# Altium PCB rascal-1.2.pcbdoc (part 3 of 3)
Units mm, origin at the board's own origin, x right, y up, seen from the top; angles counter-clockwise.
Board outline 114.3 x 53.34 mm, 4 copper layers (Top Layer, Ground Plane, Power Plane, Bottom Layer); 125 components, 215 nets, 799 pads, 468 vias.
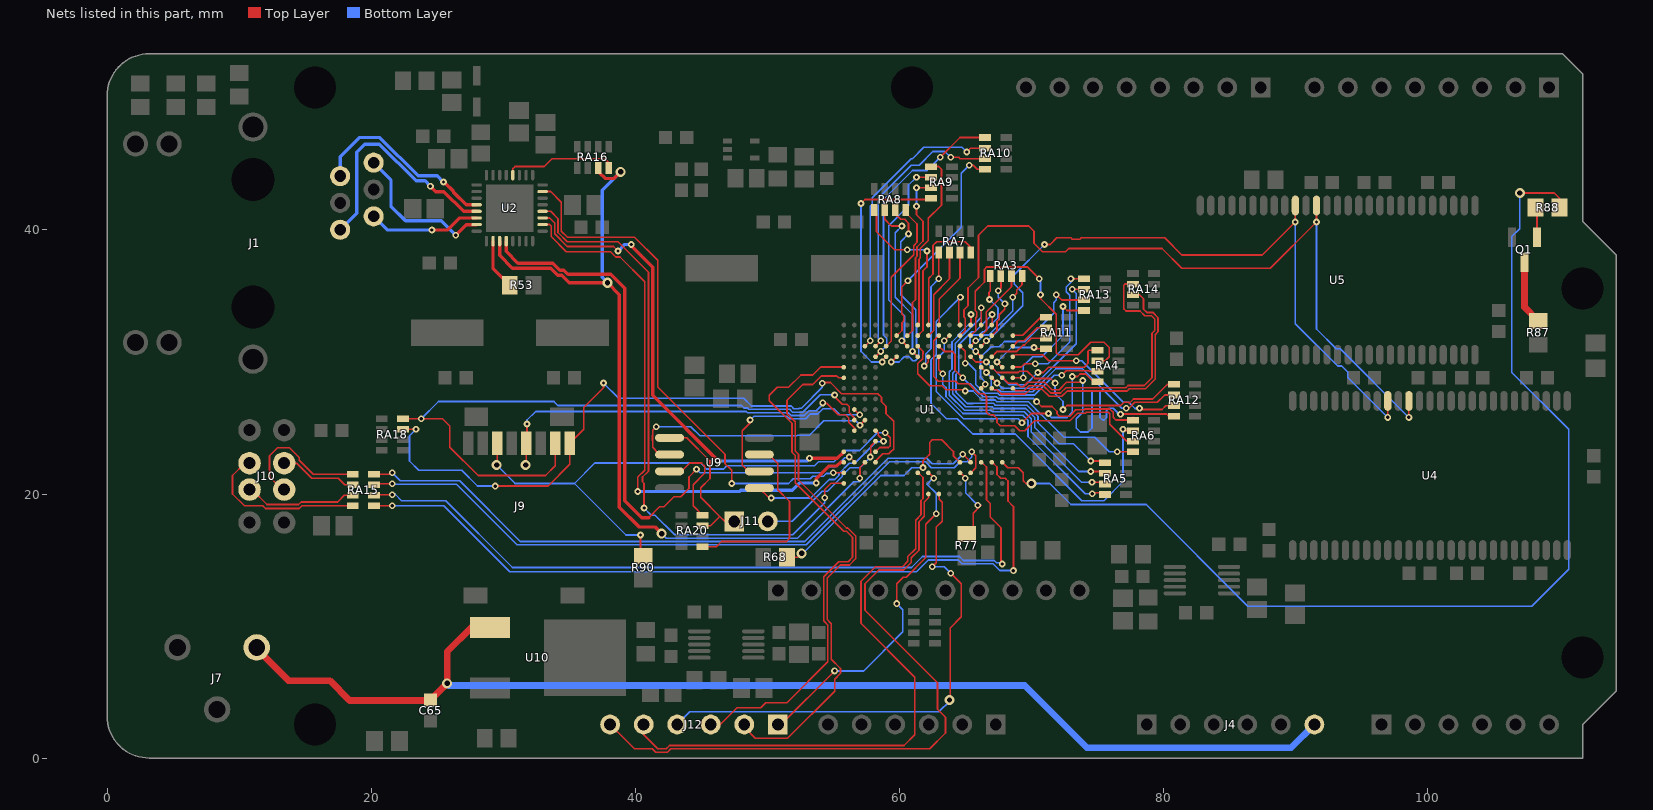
[diagram p5: the nets of this part, all layers, seen from the top]

## Via types
v1: diameter 0.508, hole 0.254, Top Layer to Bottom Layer, 360 vias
v2: diameter 0.762, hole 0.406, Top Layer to Bottom Layer, 93 vias
v3: diameter 0.66, hole 0.33, Top Layer to Bottom Layer, tented top, 9 vias
v4: diameter 3, hole 2.3, Top Layer to Bottom Layer, 4 vias
v5: diameter 1.524, hole 0.889, Top Layer to Bottom Layer, 2 vias

## Nets (pads, with @x,y where several pads share a name; then routed paths per layer and width w, separated by ;. In a path a pad name is that pad's centre, name@x,y a point inside that pad or via, vN(x,y) a via of type N, cw(c..) or ccw(c..) an arc to the next point about the centre after c; other vN are vias at no path point) (continued)
NetJ9_3: J9.3 R90.2 U1.P13 | length 44.5
  Top Layer w0.127: v2@29.5,22.3 29.55,22.35 J9.3@29.55,23.85 ; v1(40.4,16.9) 40.4,15.4 R90.2@40.6,15.2 ; U1.P13@58.23,23.216 58.53,23.516 59.182,23.516 59.316,23.65 59.316,24.265 v1(58.94,24.64)
  Bottom Layer w0.127: v2(29.5,22.2) 30.9,20.8 35.4,20.8 ; v1@40.5,16.9 v1(40.4,16.9) 39.3,16.9 35.4,20.8 ; v1(58.94,24.64) 58.34,24.64 57,23.3 55.914,23.3 55.058,22.444 53.883,22.444 53.573,22.134 46.942,22.134 46.708,21.9 45.4,21.9 44.956,22.344 36.944,22.344 35.4,20.8
NetJ9_5: J9.5 U1.T11 | length 30.2
  Top Layer w0.127: v2(31.7,22.2) 31.75,22.25 J9.5@31.75,23.85 31.8,23.9 v1@31.8,25.2 ; v1@54.164,26.864 54.494,26.864 55.366,25.993 55.928,25.993 56.168,25.753 56.168,25.447 56.16,25.44 56.63,24.97 U1.T11@56.63,24.816
  Bottom Layer w0.127: v1@31.8,25.2 v1(31.8,25.3) 31.8,25.6 32.454,26.254 48.405,26.254 48.505,26.154 51.599,26.154 51.805,25.947 52.801,25.947 53.015,26.161 53.164,26.31 53.722,26.31 v1@54.2,26.788
  other v1: 54.2,26.9
NetJ9_7: J9.7 RA18.8 U1.T10 | length 51.6
  Top Layer w0.127: RA18.8@22.4,25.7 25.4,25.7 25.956,25.144 25.956,23.544 28.1,21.4 33.2,21.4 33.95,22.15 J9.7@33.95,23.85 ; v1@54.991,27.453 55.072,27.453 55.072,27.407 55.679,26.8 56.025,26.8 56.2,26.625 56.2,26.171 56.63,25.741 U1.T10@56.63,25.616
  Bottom Layer w0.127: v1(23.8,25.7) 25.1,27 33.841,27 34.141,26.7 48.053,26.7 48.245,26.508 48.51,26.508 48.61,26.408 51.704,26.408 51.911,26.201 52.696,26.201 52.91,26.415 54.011,27.517 v1@54.927,27.517
  other v1: 55.1,27.5
NetJ9_8: J9.8 RA18.7 U1.P14 | length 53.9
  Top Layer w0.127: RA18.7@22.4,24.9 v1(23.4,24.9) ; v1(29.4,20.6) 33.4,20.6 35.05,22.25 J9.8@35.05,23.85 36.1,24.9 36.1,26.554 37.6,28.054 v1@37.6,28.4 ; v1(54.173,28.398) 54.22,28.444 54.784,28.444 55.628,27.6 58.38,27.6 58.658,27.322 58.658,26.976 58.801,26.833 ; U1.P14@58.23,22.416 58.23,22.51 58.758,23.038 59.199,23.038 59.437,23.276 59.451,23.276 59.57,23.395 59.57,25.508 58.991,26.086 58.991,26.636 58.801,26.826
  Bottom Layer w0.127: v1(23.4,24.9) 22.9,24.4 22.9,22.5 23.6,21.8 26.859,21.8 28.059,20.6 v1(29.4,20.6) ; v1@37.6,28.4 38.746,27.254 48.217,27.254 48.809,26.662 51.809,26.662 52.016,26.455 52.384,26.455 52.418,26.489 52.589,26.489 54.173,28.073 v1(54.173,28.398)
  other v1: 37.6,28.413
NetJ10_2: J10.2 RA15.2 | length 5.8
  Top Layer w0.127: J10.2@13.51,22.336 14.364,22.336 15.5,21.2 17.5,21.2 18,20.7 RA15.2@18.6,20.7
NetJ10_3: J10.3 RA15.1 | length 10.6
  Top Layer w0.127: J10.3@13.46,20.386 13.41,20.386 13.214,20.386 12.3,21.3 12.3,22.9 12.9,23.5 13.817,23.5 14.55,22.767 14.55,22.55 15.6,21.5 RA15.1@18.6,21.5
NetJ10_6: J10.6 RA15.4 | length 12.8
  Top Layer w0.127: J10.6@10.89,22.336 10.84,22.286 10.79,22.286 10.386,22.286 9.5,21.4 9.5,20 10.4,19.1 11.8,19.1 12,18.9 14.559,18.9 14.759,19.1 RA15.4@18.6,19.1
NetJ10_7: J10.7 RA15.3 | length 8.3
  Top Layer w0.127: J10.7@11.07,20.244 12.114,19.2 14.5,19.2 14.7,19.4 17.473,19.4 17.973,19.9 RA15.3@18.6,19.9
NetJ11_1: J11.1 RA20.7 U9.1 | length 11.2
  Top Layer w0.127: U9.1@43.147,24.257 43.901,24.257 45.658,22.5 45.658,21.169 44.958,20.469 44.958,19.742 46.4,18.3 ; RA20.7@45.1,17.6 45.7,17.6 46.4,18.3 ; J11.1@47.498,17.928 46.772,17.928 46.4,18.3
NetJ11_2: J11.2 U1.P12 | length 11.3
  Top Layer w0.127: v1(57.81,22.8) 57.818,22.8 v1@57.836,22.818 ; v1@57.836,22.805 v1@57.836,22.818 ; U1.P12@58.23,24.016 57.832,23.618 57.832,23.047 57.836,23.043 v1@57.836,22.818
  Bottom Layer w0.127: J11.2@50.038,17.928 51.893,17.928 54.165,20.2 54.563,20.2 55.689,21.327 55.689,21.421 56.261,21.992 57.023,21.992 v1@57.836,22.805
NetJ12_1: J12.1 U1.J15 | length 26.7
  Top Layer w0.127: J12.1@50.77,2.57 50.8,2.57 51.07,2.57 v1(55.1,6.6) ; v1(59.8,11.7) 59.8,13.2 60.3,13.7 60.515,13.7 62,15.185 62,17.7 v1(62.8,18.5) ; U1.J15@62.23,21.616 v1@62.6,21.246
  Bottom Layer w0.127: v1(55.1,6.6) 57.3,6.6 60.269,9.569 60.269,11.231 v1(59.8,11.7) ; v1@62.6,21.246 62.577,21.223 62.1,20.746 62.8,20.046 v1(62.8,18.5)
  other v1: 62.6,21.2
NetJ12_2: J12.2 U1.U6 | length 40.2
  Top Layer w0.127: J12.2@48.31,2.59 48.31,2.29 49.1,1.5 51.529,1.5 55.1,5.071 55.1,5.971 55.544,6.416 55.544,6.784 54.845,7.484 54.845,10.184 54.535,10.494 54.535,13.635 55.525,14.625 56.23,14.625 56.713,15.109 56.713,16.818 56.105,17.426 56.007,17.426 52.37,21.063 52.37,23.022 52.128,23.263 52.128,25.46 51.5,26.089 51.5,27.1 52.696,28.296 53.443,28.296 54.091,28.944 55.275,28.944 55.404,28.816 U1.U6@55.83,28.816
NetJ12_3: J12.3 U1.U5 | length 41.8
  Top Layer w0.127: J12.3@45.7,2.5 46.4,2.5 47.71,3.81 49.5,3.81 49.89,4.2 51.5,4.2 54.591,7.291 54.591,10.079 54.281,10.389 54.281,13.74 55.42,14.879 56.125,14.879 56.459,15.214 56.459,16.713 56,17.172 55.788,17.172 52.116,20.844 52.116,22.917 51.874,23.158 51.874,25.355 50.156,27.074 50.156,27.484 50.745,28.074 51.615,28.074 52.56,29.019 53.448,29.019 54.045,29.616 U1.U5@55.83,29.616
NetJ12_4: J12.4 U1.H17 | length 39.2
  Top Layer w0.127: v1(62.5,14.5) 62.8,14.8 62.8,17.5 63.246,17.946 63.246,19.384 63.03,19.6 63.03,20 U1.H17@63.03,20.016 ; v2@63.85,4.4 63.85,9.85 64.7,10.7 64.7,13.2 v1(63.9,14)
  Bottom Layer w0.127: J12.4@43.18,2.54 44.14,3.5 63,3.5 v2@63.85,4.35 ; v1(62.5,14.5) 63.4,14.5 v1(63.9,14)
  other v2: 63.8,4.4
NetJ12_5: J12.5 U1.K15 | length 47
  Top Layer w0.127: J12.5@40.64,2.54 40.64,1.774 41.716,0.699 42.339,0.699 42.595,0.954 60.354,0.954 61.17,1.77 61.17,6.13 57.1,10.2 57.1,13.4 58.201,14.502 60.239,14.502 60.649,14.911 60.649,15.267 61.238,15.856 61.238,18.016 61.646,18.424 61.646,19.505 61.8,19.659 61.8,21.246 U1.K15@61.43,21.616
NetJ12_6: J12.6 U1.J17 | length 50.6
  Top Layer w0.127: J12.6@38.1,2.54 39.94,0.7 41.3,0.7 41.555,0.445 42.445,0.445 42.7,0.7 62.3,0.7 63.5,1.9 63.5,3.1 62.9,3.7 62.9,5.7 57.4,11.2 57.4,13.2 58.448,14.248 60.345,14.248 60.903,14.805 60.903,15.162 61.492,15.751 61.492,17.91 61.9,18.318 61.9,19.4 62.23,19.73 U1.J17@62.23,20.016
NetQ1_2: Q1.1 R88.2 | length 2.3
  Top Layer w0.127: R88.2@108.2,41.7 108.3,41.6 Q1.1@108.3,39.45
NetQ1_3: Q1.3 R87.2 | length 4.9
  Top Layer w0.508: Q1.3@107.35,37.55 107.35,34.15 R87.2@108.4,33.1
NetR53_1: R53.1 U2.10 | length 3.9
  Top Layer w0.254: U2.10@29.23,39.156 29.23,37.07 R53.1@30.5,35.8
NetR68_2: R68.2 U1.F14 | length 18.5
  Top Layer w0.127: R68.2@51.5,15.2 52.3,15.2 v2(52.6,15.5) ; v1(61.8,22) 61.8,22.521 62.047,22.768 62.06,22.768 62.3,23.008 62.3,23.9 62.5,24.1 63.224,24.1 64.1,23.224 64.1,22.9 U1.F14@64.6,22.4
  Bottom Layer w0.127: v2@52.67,15.444 52.67,15.47 58.6,21.4 60.353,21.4 60.953,22 v1(61.8,22)
NetR77_2: R77.2 U1.F15 | length 6.7
  Top Layer w0.127: R77.2@64.5,16.9 65.1,16.9 65.393,16.9 65.6,17.107 65.6,18.553 66.074,19.026 v1@66.196,19.148 ; U1.F15@64.63,21.616 65.023,21.223 v1@65.03,21.216
  Bottom Layer w0.127: v1@65.03,21.216 65.03,21.2 65.03,20.07 v1(65.952,19.148) v1@66.196,19.148
  other v1: 65,21.2
NetR88_1: R88.1 U1.B14 | length 82.9
  Top Layer w0.127: U1.B14@67.8,22.4 68.21,21.99 69.01,21.99 69.4,21.6 69.4,21 69.6,20.8 ; v2(107,42.8) 109.6,42.8 110,42.4 R88.1@110,41.7
  Bottom Layer w0.127: v2(70,20.8) 71.4,20.8 73,19.2 78.7,19.2 86.4,11.5 107.908,11.5 110.7,14.292 110.7,24.9 106.4,29.2 106.4,39.5 107,40.1 v2(107,42.8)
NetRA3_1: RA3.1 U1.D4 | length 8
  Top Layer w0.127: v1(65.8,30.8) U1.D4@66.2,30.4 ; v1@66.8,34.735 66.8,35.274 66.9,35.374 RA3.1@66.9,36.5
  Bottom Layer w0.127: v1(65.8,30.8) 65.7,30.8 65.35,31.15 65.35,31.779 65.616,32.045 66.057,32.045 66.311,32.299 66.424,32.299 67.474,33.349 67.474,34.096 v1(66.835,34.735)
NetRA3_2: RA3.2 U1.C2 | length 5.2
  Top Layer w0.127: U1.C2@67.03,32.016 67.4,32.386 67.4,33.064 67.57,33.234 67.57,33.57 68,34 v1(68,34.4) ; v1(67.5,35.4) 67.7,35.6 RA3.2@67.7,36.5
  Bottom Layer w0.127: v1(67.5,35.4) 67.5,34.9 v1(68,34.4)
NetRA3_3: RA3.3 U1.D2 | length 5.5
  Top Layer w0.127: U1.D2@66.155,32.016 66.2,32.016 66.23,32.016 66.6,32.386 66.6,33.401 66.585,33.416 66.585,33.785 68.5,35.7 RA3.3@68.5,36.5
NetRA3_4: RA3.4 U1.E3 | length 7.2
  Top Layer w0.127: U1.E3@65.4,31.2 v1(65.8,31.6) ; v1(68.6,34.9) 68.9,35.2 68.9,35.447 69.3,35.847 RA3.4@69.3,36.5
  Bottom Layer w0.127: v1(65.8,31.6) 65.971,31.6 66.416,32.045 66.785,32.045 68.6,33.859 v1(68.6,34.9)
NetRA4_1: RA4.1 U1.E4 | length 12.1
  Top Layer w0.127: U1.E4@65.4,30.4 65.8,30 v1(66.6,30) ; v1(70.5,29.2) 70.9,29.2 71.3,29.6 74,29.6 74.3,29.9 74.3,30.8 74.4,30.9 RA4.1@75,30.9
  Bottom Layer w0.127: v1(66.6,30) 68.313,28.287 69.587,28.287 v1(70.5,29.2)
NetRA4_2: RA4.2 U1.E2 | length 22.6
  Top Layer w0.127: U1.E2@65.424,32.016 65.43,32.016 65.8,32.386 65.8,33.341 65.874,33.416 65.874,33.784 65.755,33.903 65.755,35.355 66.46,36.06 66.46,37.029 66.631,37.2 69.7,37.2 v1(70.6,36.3) ; v1(70.7,35.1) 70.7,34.814 71.9,33.614 71.9,30.7 72.056,30.544 73.544,30.544 74.492,31.492 75.508,31.492 75.9,31.1 75.9,30.4 75.6,30.1 RA4.2@75,30.1
  Bottom Layer w0.127: v1(70.6,36.3) 70.7,36.2 v1(70.7,35.1)
NetRA4_3: RA4.3 U1.F3 | length 13.9
  Top Layer w0.127: U1.F3@64.6,31.2 65,30.8 v1(65,29.9) ; v1(72.3,29) 72.645,29.345 73.284,29.345 73.286,29.346 74.354,29.346 74.4,29.3 RA4.3@75,29.3
  Bottom Layer w0.127: v1(65,29.9) 65.229,29.9 65.8,29.329 65.8,28.3 66.476,27.624 67.458,27.624 67.59,27.492 70.223,27.492 71.731,29 v1(72.3,29)
NetRA4_4: RA4.4 U1.G2 | length 21.6
  Top Layer w0.127: v1(63.4,31.6) U1.G2@63.8,32 ; v1(69.3,25.4) 70,26.1 v1(71.3,26.1) ; v1(73.1,28.9) 73.5,28.9 73.692,29.092 74.122,29.092 74.714,28.5 RA4.4@75,28.5
  Bottom Layer w0.127: v1(63.4,31.6) 63.4,30.8 62.8,30.2 62.8,27.763 64.863,25.7 69,25.7 v1(69.3,25.4) ; v1(71.3,26.1) 71.2,26.1 71.5,25.8 72.7,25.8 73.1,26.2 v1(73.1,28.9)
NetRA5_1: RA5.1 U1.C1 | length 21.7
  Top Layer w0.127: U1.C1@67.03,32.816 v1(67.03,33.6) ; v1(74.5,22.5) 75.584,22.5 RA5.1@75.6,22.5
  Bottom Layer w0.127: v1(67.03,33.6) 65.73,32.3 65.5,32.3 64.5,31.3 64.5,29.253 64.3,29.053 64.3,27.7 65.145,26.855 65.584,26.855 65.591,26.862 67.142,26.862 67.274,26.73 69.676,26.73 70.507,25.9 70.507,25.394 72.1,23.8 73.2,23.8 v1(74.5,22.5)
NetRA5_2: RA5.2 U1.D1 | length 23.1
  Top Layer w0.127: U1.D1@66.2,32.8 v1(66.2,34.1) ; v1(74.5,21.7) 75.584,21.7 RA5.2@75.6,21.7
  Bottom Layer w0.127: v1(66.2,34.1) 66.2,33.4 64.698,31.898 64.698,31.858 64.246,31.405 64.246,29.358 64.046,29.158 64.046,27.595 65.039,26.601 65.689,26.601 65.696,26.608 67.037,26.608 67.169,26.476 69.571,26.476 70.253,25.795 70.253,25.039 73.592,21.7 v1(74.5,21.7)
NetRA5_3: RA5.3 U1.E1 | length 22.7
  Top Layer w0.127: U1.E1@65.43,32.816 v1(65.43,33.6) ; v1(74.6,20.9) 75.584,20.9 RA5.3@75.6,20.9
  Bottom Layer w0.127: v1(65.43,33.6) 65.43,33.03 64.444,32.044 64.444,31.963 63.992,31.51 63.992,29.463 63.792,29.263 63.792,27.49 64.934,26.347 65.795,26.347 65.801,26.354 66.932,26.354 67.064,26.222 69.466,26.222 69.999,25.689 69.999,24.701 73.8,20.9 v1(74.6,20.9)
NetRA5_4: RA5.4 U1.H4 | length 19.1
  Top Layer w0.127: U1.H4@63,30.4 63,29.4 v1(63.3,29.1) ; v1(74.605,20.022) 74.683,20.1 75.584,20.1 RA5.4@75.6,20.1
  Bottom Layer w0.127: v1(63.3,29.1) 63.3,28.3 63.538,28.062 63.538,27.384 64.829,26.093 65.9,26.093 65.906,26.1 66.826,26.1 66.958,25.968 69.361,25.968 69.745,25.584 69.745,24.355 74.078,20.022 v1(74.605,20.022)
NetRA6_1: RA6.1 U1.H3 | length 18.6
  Top Layer w0.127: U1.H3@63,31.2 63.4,30.8 64.014,30.8 64.226,30.588 64.226,29.374 v1(64.8,28.8) ; v1(70.4,27) 70.77,26.63 71.57,26.63 71.946,26.254 71.946,26.082 72.128,25.9 72.9,25.9 73.376,26.376 73.997,26.376 74.066,26.445 75.934,26.445 76.195,26.184 76.195,25.805 76.4,25.6 77.5,25.6 RA6.1@77.7,25.8
  Bottom Layer w0.127: v1(64.8,28.8) 65.256,28.344 65.397,28.344 66.371,27.37 67.352,27.37 67.484,27.238 70.162,27.238 v1(70.4,27)
NetRA6_2: RA6.2 U1.F1 | length 34.2
  Top Layer w0.127: v1(64.63,34.9) 64.5,34.77 64.5,32.816 U1.F1@64.633,32.816 ; v1(76.95,24.9) 77.05,24.8 77.6,24.8 RA6.2@77.7,24.9
  Bottom Layer w0.127: v1(64.63,34.9) 62.8,33.07 62.8,30.559 62.4,30.159 62.4,26.871 63.571,25.7 64.4,25.7 65.556,24.544 68.778,24.544 73.822,19.5 75.5,19.5 76.95,20.95 v1(76.95,24.9)
NetRA6_3: RA6.3 U1.H2 | length 23
  Top Layer w0.127: U1.H2@63,32 62.6,31.6 62.6,28.9 62.956,28.544 64.27,28.544 64.47,28.344 65.256,28.344 66,27.6 66.414,27.6 66.6,27.414 66.6,26.2 66.8,26 67.125,26 67.4,25.725 67.4,25.414 67.647,25.167 ; 67.647,25.168 68.753,25.168 69.121,24.8 69.5,24.8 70.246,25.546 72.927,25.546 73.503,26.122 74.103,26.122 74.171,26.191 75.829,26.191 75.941,26.079 75.941,25.281 77.221,24 77.5,24 RA6.3@77.7,24.2
NetRA6_4: RA6.4 U1.K3 | length 21.3
  Top Layer w0.127: U1.K3@61.4,31.2 61.8,30.8 61.8,30.584 61.768,30.553 61.768,30.247 61.4,29.879 61.4,29.1 62.3,28.2 63.238,28.2 63.538,27.9 64.9,27.9 v1(65,27.8) ; v1(76.5,23.2) 77.2,23.2 77.5,23.2 77.6,23.3 RA6.4@77.7,23.4
  Bottom Layer w0.127: v1(65,27.8) 65.582,27.8 66.266,27.116 67.247,27.116 67.379,26.984 69.781,26.984 70.761,26.005 70.766,26.005 72.471,24.3 74.8,24.3 75.9,23.2 v1(76.5,23.2)
NetRA7_1: RA7.1 U1.J4 | length 9.9
  Top Layer w0.127: v1(61.9,29.7) 62.2,30 U1.J4@62.2,30.4 ; v1(63,36.3) RA7.1@63,38.3
  Bottom Layer w0.127: v1(61.9,29.7) 62,29.8 62,30.6 62.4,31 62.4,35.7 v1(63,36.3)
NetRA7_2: RA7.2 U1.J2 | length 6.9
  Top Layer w0.127: U1.J2@62.23,32.016 62.6,32.386 62.6,35.1 63.8,36.3 RA7.2@63.8,38.3
NetRA7_3: RA7.3 U1.H1 | length 6.1
  Top Layer w0.127: U1.H1@63.03,32.816 63.03,34.771 64.6,36.341 RA7.3@64.6,38.3
NetRA7_4: RA7.4 U1.J1 | length 9.6
  Top Layer w0.127: U1.J1@62.23,32.816 62.23,36.33 62.56,36.66 62.56,38.829 62.831,39.1 65,39.1 RA7.4@65.6,38.5
NetRA8_1: RA8.1 U1.K2 | length 12.4
  Top Layer w0.127: RA8.1@58.27,41.144 58.27,39.868 59.638,38.5 v1(60.6,38.5) ; U1.K2@61.43,32.016 61.8,32.386 61.8,36.9 62.1,37.2 v1(62.1,38.4)
  Bottom Layer w0.127: v1(60.6,38.5) 62,38.5 v1(62.1,38.4)
NetRA8_2: RA8.2 U1.K4 | length 13
  Top Layer w0.127: RA8.2@58.9,41.5 58.9,40.8 59.4,40.3 v1(60.2,40.3) ; v1(61,30.8) U1.K4@61.4,30.4
  Bottom Layer w0.127: v1(60.2,40.3) 59.692,39.792 59.692,34.908 61,33.6 v1(61,30.8)
NetRA8_3: RA8.3 U1.M4 | length 15.6
  Top Layer w0.127: v1(59.4,30) U1.M4@59.8,30.4 ; RA8.3@59.7,41.5 59.7,41.2 60.1,40.8 60.414,40.8 60.7,40.514 v1(60.7,39.7)
  Bottom Layer w0.127: v1(59.4,30) 59.984,30 60.376,30.392 60.739,30.392 61.031,30.1 61.2,30.1 61.47,30.37 61.47,31.144 61.3,31.314 61.3,32.689 61.254,32.735 61.254,33.946 60.1,35.1 60.1,39.1 v1(60.7,39.7)
NetRA8_4: RA8.4 U1.N3 | length 11.5
  Top Layer w0.127: U1.N3@59.03,31.216 59.4,31.586 59.4,36.429 61.087,38.116 ; RA8.4@60.4,41.4 61.345,40.455 61.345,39.063 61.092,38.81 61.092,38.11 ; RA8.4@60.498,41.498 RA8.4@60.5,41.5
NetRA9_1: RA9.1 U1.K1 | length 13.4
  Top Layer w0.127: U1.K1@61.43,32.816 61.487,32.873 61.487,37.787 61.6,37.9 61.6,38.6 62.2,39.2 62.2,40.874 63.2,41.874 63.2,44.6 63,44.8 RA9.1@62.4,44.8
NetRA9_2: RA9.2 U1.L3 | length 15.5
  Top Layer w0.127: v1(60.2,31.6) U1.L3@60.6,31.2 ; v1(61.3,44) RA9.2@62.4,44
  Bottom Layer w0.127: v1(60.2,31.6) 60.4,31.8 60.4,33.5 59.2,34.7 59.2,40.329 60.7,41.829 60.7,43.4 v1(61.3,44)
NetRA9_3: RA9.3 U1.L2 | length 13
  Top Layer w0.127: U1.L2@60.63,32.016 61,32.386 61,34.5 61.225,34.725 61.225,37.884 61.346,38.005 61.346,38.705 61.8,39.159 61.8,40.659 61.3,41.159 v1(61.3,41.8) ; v1(61.3,43.2) RA9.3@62.4,43.2
  Bottom Layer w0.127: v1(61.3,41.8) v1(61.3,43.2)
NetRA9_4: RA9.4 U1.N4 | length 19.1
  Top Layer w0.127: v1(57.1,42) 57.4,42.3 62.3,42.3 RA9.4@62.4,42.4 ; v1(58.7,30) 58.7,30.1 U1.N4@59,30.4
  Bottom Layer w0.127: v1(57.1,42) 57.1,30.8 57.9,30 v1(58.7,30)
NetRA10_1: RA10.1 U1.P4 | length 22
  Top Layer w0.127: U1.P4@58.23,30.416 58.216,30.416 v1(58.6,30.8) ; v1(63.1,45.5) 64.6,47 RA10.1@66.5,47
  Bottom Layer w0.127: v1(58.6,30.8) 59.044,31.244 59.044,31.784 58.8,32.029 58.8,42.3 61,44.5 62.1,44.5 v1(63.1,45.5)
NetRA10_2: RA10.2 U1.R3 | length 22
  Top Layer w0.127: U1.R3@57.43,31.216 57.8,31.586 v1(57.8,31.6) ; v1(65.1,45.9) 65.4,46.2 RA10.2@66.7,46.2
  Bottom Layer w0.127: v1(57.8,31.6) 57.8,41.8 57.944,41.944 57.944,42.444 60.9,45.4 61,45.4 61.854,46.254 64.746,46.254 v1(65.1,45.9)
NetRA10_3: RA10.3 U1.P3 | length 21.2
  Top Layer w0.127: U1.P3@58.23,31.216 58.6,31.586 v1(58.6,31.6) ; v1(63.9,45.5) 64.5,45.5 64.6,45.4 RA10.3@66.5,45.4
  Bottom Layer w0.127: v1(58.6,31.6) 58.4,31.8 58.4,42.4 60.9,44.9 61.5,44.9 62.545,45.945 63.455,45.945 v1(63.9,45.5)
NetRA10_4: RA10.4 U1.M2 | length 16.6
  Top Layer w0.127: U1.M2@59.83,32.016 60.2,32.386 60.2,32.971 60.344,33.116 60.344,33.484 60.186,33.643 60.186,35.678 v1(60.654,36.146) ; v1(65.3,44.9) 65.6,44.9 65.9,44.6 RA10.4@66.5,44.6
  Bottom Layer w0.127: v1(60.654,36.146) 64.7,40.193 64.7,44.3 v1(65.3,44.9)
NetRA11_1: RA11.1 U1.A2 | length 2.9
  Top Layer w0.127: U1.A2@68.63,32.016 69.342,32.016 70.726,33.4 RA11.1@71,33.4
NetRA11_2: RA11.2 U1.A3 | length 3
  Top Layer w0.127: U1.A3@68.63,31.216 69.014,31.6 69.441,31.6 70.441,32.6 RA11.2@71.1,32.6
NetRA11_3: RA11.3 U1.C4 | length 4.6
  Top Layer w0.127: U1.C4@67.03,30.416 67.414,30.8 68.9,30.8 69.384,31.284 69.484,31.284 70,31.8 RA11.3@71.1,31.8
NetRA11_4: RA11.4 U1.B5 | length 4.8
  Top Layer w0.127: v1(67.4,30) U1.B5@67.8,29.6 ; v1(70.2,31.1) 70.3,31 RA11.4@71.1,31
  Bottom Layer w0.127: v1(67.4,30) 68.5,31.1 v1(70.2,31.1)
NetRA12_1: RA12.1 U1.C5 | length 16.9
  Top Layer w0.127: U1.C5@67,29.6 67.4,29.2 69,29.2 69.1,29.3 69.7,29.3 70.256,28.744 71.456,28.744 v1(71.8,28.4) ; v1(72.4,26.4) 72.699,26.699 76.77,26.699 77.016,26.945 77.384,26.945 77.435,26.894 77.739,27.199 79.199,27.199 80.3,28.3 RA12.1@80.8,28.3
  Bottom Layer w0.127: v1(71.8,28.4) 71.8,27.6 72.4,27 v1(72.4,26.4)
NetRA12_2: RA12.2 U1.D5 | length 18.2
  Top Layer w0.127: U1.D5@66.2,29.6 v1(66.6,29.2) ; v1(77.2,26.5) 77.4,26.5 77.845,26.945 79.541,26.945 80.096,27.5 RA12.2@80.8,27.5
  Bottom Layer w0.127: v1(66.6,29.2) 66.955,28.844 66.955,28.127 67.204,27.878 67.563,27.878 67.695,27.746 70.118,27.746 71.872,29.5 73.86,29.5 76.86,26.5 v1(77.2,26.5)
NetRA12_3: RA12.3 U1.A4 | length 13.9
  Top Layer w0.127: U1.A4@68.63,30.416 68.758,30.545 70.855,30.545 71.317,30.083 v1(73.4,30.083) ; v1@78.3,26.4 79.9,26.4 80.19,26.691 80.791,26.691 RA12.3@80.8,26.7
  Bottom Layer w0.127: v1(73.4,30.083) 73.817,30.083 76.956,26.945 77.384,26.945 77.858,26.47 v1@78.17,26.47
  other v1: 78.2,26.5
NetRA12_4: RA12.4 U1.B6 | length 24.5
  Top Layer w0.127: U1.B6@67.83,28.816 68.246,28.4 68.9,28.4 69.177,28.123 69.386,28.123 69.724,28.46 71.005,28.46 71.565,27.9 72.104,27.9 72.659,28.456 73.755,28.456 v1(73.9,28.6) ; v1@73.862,28.438 v1@73.9,28.4 ; v1@76.754,26.056 80.245,26.056 80.4,25.9 RA12.4@80.8,25.9
  Bottom Layer w0.127: v1@74.1,28.6 v1(73.9,28.6) 73.9,26.2 73.4,25.7 73.4,25 73.7,24.7 74.3,24.7 74.6,25 74.6,27.7 74.7,27.8 75.1,27.8 75.2,27.7 75.2,25.8 75.4,25.6 75.5,25.6 75.7,25.8 75.7,26.29 75.91,26.5 76.2,26.5 76.5,26.2 76.5,26.1 76.552,26.048 v1(76.754,26.048)
NetRA13_1: RA13.1 U1.A5 | length 11.3
  Top Layer w0.127: U1.A5@68.63,29.616 69.245,29.616 69.504,29.876 v1(70.3,29.876) ; v1(73,36.3) RA13.1@74,36.3 RA13.1@74.2,36.3
  Bottom Layer w0.127: v1(70.3,29.876) 71.26,29.876 72.9,31.516 72.9,35.063 72.647,35.316 72.647,35.684 73.1,36.137 v1@73.1,36.3
NetRA13_2: RA13.2 U1.C6 | length 13.3
  Top Layer w0.127: U1.C6@67,28.8 v1(67.4,28.4) ; v1(73.091,35.5) RA13.2@74,35.5
  Bottom Layer w0.127: v1(67.4,28.4) 67.8,28 70.013,28 73.4,31.387 73.4,35.191 v1(73.091,35.5)
NetRA13_3: RA13.3 U1.D7 | length 13.4
  Top Layer w0.127: U1.D7@66.2,28 66.516,28.316 v1@66.6,28.4 ; v1(71.9,35.1) 72.3,34.7 RA13.3@74,34.7
  Bottom Layer w0.127: v1@66.6,28.4 66.595,28.405 66.155,28.844 66.155,30.355 66.955,31.156 67.584,31.156 67.973,31.544 69.544,31.544 71.701,33.701 71.701,34.489 71.9,34.688 v1(71.9,35.1)
  other v1: 66.511,28.321
NetRA13_4: RA13.4 U1.A6 | length 9.5
  Top Layer w0.127: U1.A6@68.6,28.816 v1@69.3,28.816 ; v1(72.4,34.2) 72.7,33.9 RA13.4@74,33.9
  Bottom Layer w0.127: v1(69.4,28.816) 69.4,29.7 70.101,30.401 70.801,30.401 72.4,32 v1(72.4,34.2)
NetRA14_2: RA14.2 U1.A7 | length 21.2
  Top Layer w0.127: U1.A7@68.63,28.016 68.824,27.822 69.445,27.822 69.829,28.206 70.9,28.206 71.46,27.646 72.209,27.646 72.623,28.06 77.163,28.06 77.318,28.215 78.543,28.215 79.145,28.816 79.145,29.184 79.138,29.191 79.138,32.179 79.344,32.385 79.344,33.255 79.1,33.5 78.6,33.5 78.235,33.865 78.229,33.86 77.171,33.86 77,34.031 77,35.8 77.1,35.9 RA14.2@77.7,35.9
NetRA14_3: RA14.3 U1.C7 | length 21.3
  Top Layer w0.127: U1.C7@67.03,28.016 67.146,27.9 67.379,27.9 67.711,27.568 69.55,27.568 69.934,27.952 70.795,27.952 71.355,27.392 72.314,27.392 72.722,27.8 77.263,27.8 77.424,27.961 78.648,27.961 79.399,28.711 79.399,29.289 79.392,29.296 79.392,32.074 79.598,32.28 79.598,33.361 79.205,33.754 78.746,33.754 78.5,34 78.5,34.8 78.2,35.1 RA14.3@77.7,35.1
NetRA15_5: RA15.5 U1.C14 | length 60.3
  Top Layer w0.127: RA15.5@20.2,19.1 v1(21.6,19.1) ; U1.C14@67.03,22.416 67.4,22.046 67.4,21.479 67.679,21.2 68.014,21.2 68.232,20.982 68.232,19.468 68.645,19.055 v1(68.645,14.2)
  Bottom Layer w0.127: v1(21.6,19.1) 25.5,19.1 30.5,14.1 61.3,14.1 62.208,15.008 64.453,15.008 64.753,14.707 67.092,14.707 67.6,14.2 v1(68.645,14.2)
NetRA15_6: RA15.6 U1.D14 | length 58.8
  Top Layer w0.127: RA15.6@20.2,19.9 20.233,19.933 v1(21.6,19.933) ; U1.D14@66.23,22.416 66.6,22.046 66.6,19.575 66.9,19.275 66.9,18.255 67.7,17.455 67.7,14.797 67.797,14.7 v1(67.8,14.7)
  Bottom Layer w0.127: v1@21.6,19.8 21.667,19.867 21.8,20 22.3,19.5 25.639,19.5 30.71,14.429 60.929,14.429 61.762,15.262 64.559,15.262 64.859,14.961 67.198,14.961 67.362,14.797 67.648,14.797 v1@67.7,14.746
NetRA15_7: RA15.7 U1.E15 | length 52.6
  Top Layer w0.127: RA15.7@20.2,20.7 20.267,20.767 v1(21.6,20.767) ; U1.E15@65.43,21.616 65.8,21.986 65.8,22.9 v1(65.5,23.2)
  Bottom Layer w0.127: v1@21.6,20.7 21.633,20.733 26.467,20.733 31.05,16.15 52.95,16.15 59.254,22.454 60.858,22.454 60.868,22.444 61.984,22.444 62.429,22 64.159,22 64.613,22.454 65.144,22.454 ; 65.144,22.444 65.5,22.8 v1@65.5,23.2
NetRA15_8: RA15.8 U1.E14 | length 50.5
  Top Layer w0.127: RA15.8@20.2,21.5 21.5,21.5 v1(21.6,21.6) ; v1@64.946,22.9 U1.E14@65.43,22.416
  Bottom Layer w0.127: v1(21.6,21.6) 22.2,21 26.7,21 31.296,16.404 52.845,16.404 59.149,22.708 60.963,22.708 60.973,22.698 62.089,22.698 62.488,22.3 64.1,22.3 v1(64.8,23)
NetRA16_7: RA16.7 U1.R14 U2.11 | length 61.3
  Top Layer w0.127: v1@57.023,21.23 57.023,22.009 U1.R14@57.43,22.416
  Top Layer w0.254: U2.11@29.73,39.156 29.73,38.07 30.7,37.1 33.6,37.1 34.143,36.557 34.443,36.557 35.001,35.999 v2(37.901,35.999) 38.8,35.1 38.8,19 40.3,17.5 41.5,17.5 v2(42,17) ; RA16.7@37.27,44.344 37.714,43.9 38.4,43.9 v2(38.9,44.4)
  Bottom Layer w0.127: v2(42,17) 42.342,16.658 52.287,16.658 56.559,20.93 57.012,20.93 v1@57.012,21.23
  Bottom Layer w0.254: v2(37.901,35.999) 37.5,36.4 37.5,43 v2(38.9,44.4)
  other v1: 57,21.2
NetRA16_8: RA16.8 U2.28 | length 8.6
  Top Layer w0.127: U2.28@30.73,44.156 30.73,44.636 30.9,44.806 33.106,44.806 33.7,45.4 37.7,45.4 38,45.1 RA16.8@38,44.7
NetRA20_5: RA20.5 U9.7 | length 15.4
  Top Layer w0.127: RA20.5@45.1,16 46.131,16 46.531,16.4 51.452,16.4 51.689,16.637 51.689,19.434 50.8,20.323 50.8,22.308 50.1,23.008 49.4,23.008 U9.7@49.2,23.008 ; U9.7@49.185,22.987 U9.7@49.4,22.987 U9.7@49.849,22.987
NetRA20_8: RA20.8 U9.3 | length 8.1
  Top Layer w0.127: U9.3@41.594,21.738 U9.3@42.102,21.738 ; U9.3@42.385,21.717 U9.3@42.6,21.717 43.499,21.717 44.134,22.352 45.023,22.352 45.277,22.098 45.277,21.59 44.388,20.701 44.388,19.112 RA20.8@45.1,18.4
NetU1_P11: U1.P11 U9.5 | length 13.4
  Top Layer w0.127: U9.5@49.403,20.447 50.05,19.8 50.2,19.8 v1(50.3,19.7) ; U9.5@49.582,20.447 U9.5@50.103,20.447 ; U1.P11@58.23,24.816 58.4,24.646 58.4,24.446 v1@58.875,23.971
  Bottom Layer w0.127: v1(50.3,19.7) 53.306,19.7 54.706,21.1 55.104,21.1 55.435,21.432 55.435,21.548 56.223,22.335 56.635,22.335 58.261,23.961 v1@58.991,23.961
  other v1: 58.8,24
NetU1_R10: U1.R10 U9.2 | length 19.4
  Top Layer w0.127: v1(41.6,25.1) 41.317,24.817 41.317,24.468 41.31,24.46 41.31,24.054 41.317,24.046 41.317,23.535 41.717,23.135 U9.2@41.975,23.135 ; v1@57.023,25.209 U1.R10@57.43,25.616
  Bottom Layer w0.127: v1(41.6,25.1) 44.2,25.1 44.9,24.4 52.254,24.4 52.31,24.456 53.197,24.456 54.289,25.548 56.691,25.548 v1(57.023,25.216)
NetU1_T9: U1.T9 U9.6 | length 15.3
  Top Layer w0.127: v1(48.7,25.6) 48.7,25.402 48.1,24.802 48.1,22.2 48.583,21.717 U9.6@49.185,21.717 ; U9.6@49.074,21.717 U9.6@49.185,21.717 ; U9.6@49.828,21.717 U9.6@49.4,21.717 U9.6@49.185,21.717 ; U1.T9@56.6,26.4 v1(57,26)
  Bottom Layer w0.127: v1(48.7,25.6) 49,25.9 51.494,25.9 51.7,25.693 52.906,25.693 53.269,26.056 53.827,26.056 54.227,26.455 55.037,26.455 55.493,26 v1(57,26)
NetU1_T14: U1.T14 U2.12 | length 47.9
  Top Layer w0.127: 41.014,18.2 41.844,19.03 42.178,19.03 42.94,19.792 43.439,19.792 44.07,20.423 44.07,21.293 v1(44.642,21.865) ; v1@56.274,22.779 v1(56.2,22.8) 56.621,22.424 U1.T14@56.63,22.416
  Top Layer w0.254: U2.12@30.23,39.156 30.23,38.37 31.119,37.481 33.758,37.481 34.301,36.938 34.601,36.938 34.904,36.634 38.164,36.634 39.2,35.598 39.2,19.5 40.5,18.2 41.014,18.2
  Bottom Layer w0.127: v1(44.642,21.865) 44.907,21.6 54.157,21.6 54.618,22.061 55.175,22.061 55.861,22.747 v1@56.253,22.747
NetU1_U13: U1.U13 U2.19 | length 37.4
  Top Layer w0.127: U2.19@32.98,40.906 33.524,40.906 33.9,40.53 33.9,39.7 34.856,38.744 38.356,38.744 v1(38.7,38.4)
  Top Layer w0.254: v1(39.7,38.9) 39.7,38.8 41.317,37.183 41.317,27.483 v1(46.3,22.5) ; v1(53.2,22.7) 55.314,22.7 U1.U13@55.83,23.216
  Bottom Layer w0.254: v1(38.7,38.4) 39.2,38.9 v1(39.7,38.9) ; v1(46.3,22.5) 53,22.5 v1(53.2,22.7)
NetU1_U14: U1.U14 U2.18 | length 42.9
  Top Layer w0.127: U2.18@32.98,40.406 33.524,40.406 33.63,40.3 33.63,39.5 34.786,38.344 38.127,38.344 38.516,37.955 38.844,37.955 40.718,36.082 40.718,21.805 40.2,21.288 v1(40.2,20.187)
  Top Layer w0.254: v1(53.721,20.828) 53.721,21.164 54.681,22.124 55.277,22.124 55.569,22.416 U1.U14@55.83,22.416
  Bottom Layer w0.254: v1(40.2,20.187) 47.887,20.187 47.996,20.296 51.905,20.296 52.437,20.828 v1(53.721,20.828)
NetU1_U15: U1.U15 U2.23 | length 40.4
  Top Layer w0.127: U2.23@32.98,42.906 33.594,42.906 34.408,42.092 34.408,39.91 34.868,39.45 39.95,39.45 41.7,37.7 41.7,28.1 46.8,23 46.8,22.3 47.3,21.8 v1(47.3,20.8) ; v1(54.991,21.616) U1.U15@55.83,21.616
  Bottom Layer w0.127: v1(47.3,20.8) 51.608,20.8 51.975,21.167 53.267,21.167 53.446,21.346 54.262,21.346 54.464,21.548 54.732,21.548 54.946,21.762 v1(54.991,21.616)
NetU1_U16: U1.U16 U2.20 | length 46.8
  Top Layer w0.127: U2.20@32.98,41.406 33.594,41.406 34.154,40.846 34.154,39.805 34.859,39.1 38.7,39.1 41,36.8 41,21.729 40.555,21.284 40.555,20.916 40.67,20.801 v1(40.67,18.944) ; v1(54.356,19.706) 54.356,20.341 54.831,20.816 U1.U16@55.83,20.816
  Bottom Layer w0.127: v1(40.67,18.944) 41.214,18.4 41.5,18.4 42.988,16.912 51.943,16.912 54.356,19.325 v1(54.356,19.706)
RAS: U1.D3 U4.18 U5.18 | length 51.5
  Top Layer w0.127: U1.D3@66.2,31.2 v1(66.6,31.6) ; v1(71,38.9) 71.429,38.9 71.929,39.4 73.012,39.4 73.111,39.301 73.689,39.301 73.788,39.4 80.1,39.4 81.4,38.1 87.5,38.1 v1(90,40.6) U5.18@90,41.85 ; v1(97,25.8) U4.18@97,27.05
  Bottom Layer w0.127: v1(66.6,31.6) 66.7,31.6 69.354,34.254 69.354,35.254 68.7,35.908 68.7,36.6 v1(71,38.9) ; v1(90,40.6) 90,32.9 93.2,29.7 93.508,29.7 93.972,29.237 93.972,28.828 v1(97,25.8)
RXM: J1.6 U2.4 | length 14.6
  Top Layer w0.254: J1.6@17.649,44.08 J1.6@17.72,44.08 ; v1(25.472,43.628) 25.52,43.628 26.235,42.913 26.235,42.865 27.194,41.906 U2.4@27.98,41.906
  Bottom Layer w0.254: J1.6@17.649,44.08 17.649,45.549 19.1,47 20.667,47 23.567,44.1 25,44.1 v1(25.472,43.628)
RXP: J1.4 U2.5 | length 17.8
  Top Layer w0.254: v1(24.486,43.314) 24.896,42.904 25.496,42.904 26.994,41.406 U2.5@27.98,41.406
  Bottom Layer w0.254: J1.4@17.649,40.016 18.9,41.267 18.9,45.9 19.5,46.5 20.628,46.5 23.409,43.719 24.081,43.719 v1(24.486,43.314)
TXM: J1.10 U2.6 | length 8.6
  Top Layer w0.254: v1(24.6,40) 25.8,40 26.706,40.906 U2.6@27.98,40.906 U2.6@27.974,40.9
  Bottom Layer w0.254: J1.10@20.189,41.032 21.221,40 v1(24.6,40)
TXP: J1.12 U2.7 | length 11.6
  Top Layer w0.254: v1(26.4,39.6) 27.206,40.406 U2.7@27.98,40.406
  Bottom Layer w0.254: J1.12@20.189,45.096 21.5,43.785 21.5,41.8 22.6,40.7 25.3,40.7 v1(26.4,39.6)
VIN: C65.2 J4.6 J7.1 U10.1 | length 91.5
  Top Layer w0.508: J7.1@11.273,8.327 13.737,5.863 16.872,5.863 18.372,4.363 24.463,4.363 C65.2@24.5,4.4 v2(25.754,5.654) 25.754,8.054 27.6,9.9 U10.1@29,9.9
  Bottom Layer w0.508: v2(25.754,5.654) 25.909,5.5 69.5,5.5 74.217,0.783 89.683,0.783 J4.6@91.44,2.54
WE: U1.F2 U4.16 U5.16 | length 58
  Top Layer w0.127: U1.F2@64.63,32.016 65,32.386 65,33.3 64.907,33.393 64.907,33.954 65.2,34.246 65.2,35.6 66,36.4 66,39.6 66.7,40.3 69.8,40.3 70.2,39.9 70.2,39 70.844,38.356 72.584,38.356 72.829,38.6 79.9,38.6 81.4,37.1 88.1,37.1 v1(91.6,40.6) U5.16@91.6,41.85 ; v1(98.6,25.8) U4.16@98.6,27.05
  Bottom Layer w0.127: v1(91.6,40.6) 91.6,32.492 93.092,31 93.4,31 v1(98.6,25.8)
pads on no net: J1.0 J1.1 J1.2 J1.3 J1.5 J1.11 J7.3 J8.2 J8.3 J8.6 RA14.1 RA14.4 RA14.5 RA14.8 RA16.3 RA16.6 RA20.6 U1.A9 U1.A10 U1.A11 U1.A12 U1.A13 U1.A14 U1.A16 U1.B7 U1.B8 U1.B9 U1.B10 U1.B11 U1.B12 U1.B13 U1.B15 U1.B16 U1.C9 U1.C10 U1.C11 U1.C12 U1.C13 U1.C15 U1.C17 U1.D13 U1.D15 U1.D17 U1.E17 U1.F16 U1.G1 U1.H16 U1.L14 U1.N14 U1.N15 U1.P6 U1.P7 U1.P9 U1.P10 U1.P15 U1.P16 U1.R1 U1.R5 U1.R6 U1.R8 U1.R9 U1.R11 U1.R12 U1.R17 U1.T1 U1.T6 U1.T8 U1.T16 U1.T17 U1.U7 U1.U8 U2.13 U2.14 U2.21 U2.22 U2.26 U2.27 U2.29 U4.40 U5.40 U6.1 U6.2 U7.1 U7.2

## Polygon pours and split planes (outlines as drawn)
GND on Ground Plane (split plane): 3.175,52.83 110.025,52.83 111.25,51.605 111.25,40.64 111.259,40.54 111.288,40.445 111.336,40.356 111.399,40.279 113.79,37.889 113.79,5.291 111.399,2.901 111.336,2.824 111.288,2.735 111.259,2.64 111.25,2.54 111.25,0.51 3.175,0.51 3.158,0.509 2.943,0.518 2.712,0.549 2.485,0.599 2.263,0.669 2.048,0.758 1.841,0.865 1.645,0.99 1.461,1.132 1.289,1.289 1.132,1.461 0.99,1.645 0.865,1.841 0.758,2.048 0.669,2.263 0.599,2.485 0.549,2.712 0.518,2.943 0.509,3.158 0.51,3.175 0.51,50.166 0.509,50.183 0.518,50.398 0.549,50.629 0.599,50.856 0.669,51.078 0.758,51.293 0.865,51.499 0.99,51.696 1.132,51.88 1.289,52.052 1.461,52.209 1.645,52.351 1.841,52.476 2.048,52.583 2.263,52.672 2.485,52.742 2.712,52.792 2.943,52.823 3.151,52.832
3V3 on Power Plane (split plane): 3.175,52.83 110.025,52.83 111.25,51.605 111.25,40.64 111.259,40.54 111.288,40.445 111.336,40.356 111.399,40.279 113.79,37.889 113.79,5.291 111.399,2.901 111.336,2.824 111.288,2.735 111.259,2.64 111.25,2.54 111.25,0.51 3.175,0.51 3.158,0.509 2.943,0.518 2.712,0.549 2.485,0.599 2.263,0.669 2.048,0.758 1.841,0.865 1.645,0.99 1.461,1.132 1.289,1.289 1.132,1.461 0.99,1.645 0.865,1.841 0.758,2.048 0.669,2.263 0.599,2.485 0.549,2.712 0.518,2.943 0.509,3.158 0.51,3.175 0.51,50.166 0.509,50.183 0.518,50.398 0.549,50.629 0.599,50.856 0.669,51.078 0.758,51.293 0.865,51.499 0.99,51.696 1.132,51.88 1.289,52.052 1.461,52.209 1.645,52.351 1.841,52.476 2.048,52.583 2.263,52.672 2.485,52.742 2.712,52.792 2.943,52.823 3.151,52.832

## Other copper
Bottom Layer:
  rectangle net GND: 26.4,5.9 46.5,13.2

## Silkscreen, mask and mechanical layers (free items; w line width, h text height)
Top Overlay:
  circle w0.127: c47.4,42 r0.762
  circle w0.127: c47.8,12.319 r0.762
  circle w0.127: c70.788,19.5 r0.762
  circle w0.127: c15.748,50.8 r2.667
  circle w0.127: c15.748,2.54 r2.667
  circle w0.127: c111.76,35.56 r2.667
  circle w0.127: c60.96,50.8 r2.667
  lines w0.127: 109.093,7.62 cw(c111.76,7.62) 110.426,5.31
  text "Rascal 1.2" at 35.305,50.8 h2.54
  text "GND" at 51.5,50.6 h1.27
  text "2012-04-04" at 35.305,48.408 h2.54
  text "5" at 97.29,48.182 h2.54 r90
  text "3" at 102.398,48.181 h2.54 r90
  text "9" at 85.604,48.111 h2.54 r90
  text "8" at 88.138,48.116 h2.54 r90
  text "6" at 94.77,48.111 h2.54 r90
  text "2" at 104.942,48.1 h2.54 r90
  text "7" at 92.202,48.063 h2.54 r90
  text "4" at 99.834,48.006 h2.54 r90
  text "11" at 80.516,47.265 h2.54 r90
  text "13" at 75.47,47.038 h2.54 r90
  text "12" at 78.003,46.96 h2.54 r90
  text "10" at 83.071,46.95 h2.54 r90
  text "+" at 97.4,45 h1.27 r90
  text "GND" at 72.936,44.979 h2.54 r90
  text "TX 1" at 107.465,44.966 h2.54 r90
  text "RX 0" at 110.03,44.793 h2.54 r90
  text "-" at 89.9,44.4 h1.27
  text "-" at 94.1,44.4 h1.27
  text "+" at 103,44.1 h1.27 r90
  text "-" at 98.9,44 h1.27
  text "+" at 81.3,43.1 h1.27 r90
  text "+" at 104.1,43 h1.27 r90
  text "A/D REF" at 70.396,41.07 h2.54 r90
  text "-" at 105.6,40.7 h1.27
  text "+" at 81.104,32.845 h1.27 r90
  text "-" at 105.1,30.5 h1.27
  text "+" at 106.1,29.5 h1.27 r90
  text "+" at 98,29.1 h1.27 r90
  text "+" at 113.192,26.4 h1.27 r90
  text "+" at 86.8,17.7 h1.27 r90
  text "1.0 V" at 72.9,16.932 h1.27
  text "-" at 111.8,15.6 h1.27
  text "-" at 88.5,14.2 h1.27
  text "-" at 110.1,14 h1.27
  text "+" at 97,13.8 h1.27 r90
  text "-" at 105.3,13.7 h1.27
  text "3.3 V" at 43.5,13.1 h1.27
  text "-" at 100.1,12 h1.27
  text "+" at 102.4,12 h1.27 r90
  text "+" at 107.1,12 h1.27 r90
  text "G" at 15.3,6.4 h10
  text "GND" at 68,4.2 h2.54 r90
  text "DTXD" at 57.91,4.175 h2.54 r90
  text "DRXD" at 60.41,4.175 h2.54 r90
  text "RST" at 79.534,4.191 h2.54 r90
  text "3.3 V" at 82.067,4.191 h2.54 r90
  text "5 V" at 84.58,4.191 h2.54 r90
  text "GND" at 87.135,4.191 h2.54 r90
  text "GND" at 89.668,4.191 h2.54 r90
  text "VIN" at 92.202,4.191 h2.54 r90
  text "A0" at 97.187,4.191 h2.54 r90
  text "A1" at 99.72,4.191 h2.54 r90
  text "A2" at 102.233,4.191 h2.54 r90
  text "A3" at 104.788,4.191 h2.54 r90
  text "SDA" at 107.321,4.191 h2.54 r90
  text "SCL" at 109.855,4.191 h2.54 r90
  text "rascal micro" at 1.4,1.1 h2.5
  text "5 V" at 23.9,0.8 h1.27
Bottom Overlay:
  text "A/D REF" at 70.396,49.214 h2.54 r90
  text "GND" at 72.936,49.214 h2.54 r90
  text "13" at 75.47,49.214 h2.54 r90
  text "12" at 78.003,49.214 h2.54 r90
  text "11" at 80.516,49.214 h2.54 r90
  text "10" at 83.071,49.214 h2.54 r90
  text "9" at 85.604,49.214 h2.54 r90
  text "8" at 88.138,49.214 h2.54 r90
  text "7" at 92.202,49.214 h2.54 r90
  text "6" at 94.77,49.214 h2.54 r90
  text "5" at 97.29,49.214 h2.54 r90
  text "4" at 99.834,49.214 h2.54 r90
  text "3" at 102.398,49.214 h2.54 r90
  text "2" at 104.942,49.214 h2.54 r90
  text "TX 1" at 107.465,49.214 h2.54 r90
  text "RX 0" at 110.03,49.214 h2.54 r90
  text "Secret JTAG port" at 68.35,9.95 h2.54
  text "3.3 V" at 82.067,9.291 h2.54 r90
  text "GND" at 87.135,8.227 h2.54 r90
  text "GND" at 89.668,8.227 h2.54 r90
  text "SDA" at 107.321,7.88 h2.54 r90
  text "RST" at 79.534,7.675 h2.54 r90
  text "SCL" at 109.855,7.578 h2.54 r90
  text "VIN" at 92.202,7.329 h2.54 r90
  text "5 V" at 84.58,7.183 h2.54 r90
  text "A0" at 97.187,6.646 h2.54 r90
  text "A2" at 102.233,6.637 h2.54 r90
  text "A3" at 104.788,6.559 h2.54 r90
  text "A1" at 99.72,6.332 h2.54 r90
Mechanical 1:
  the board outline again, w0.076
  text "Licensed under the Creative Commons Attribution-Share Alike 3.0 United States license" at 1.016,57.933 h1.52
  text "http://creativecommons.org/licenses/by-sa/3.0/us/" at 1.016,56.282 h1.52
  text "Copyright Rascal Micro LLC" at 1.016,54.631 h1.52